# Allegro board ADI_BASEBOARD_V1.brd
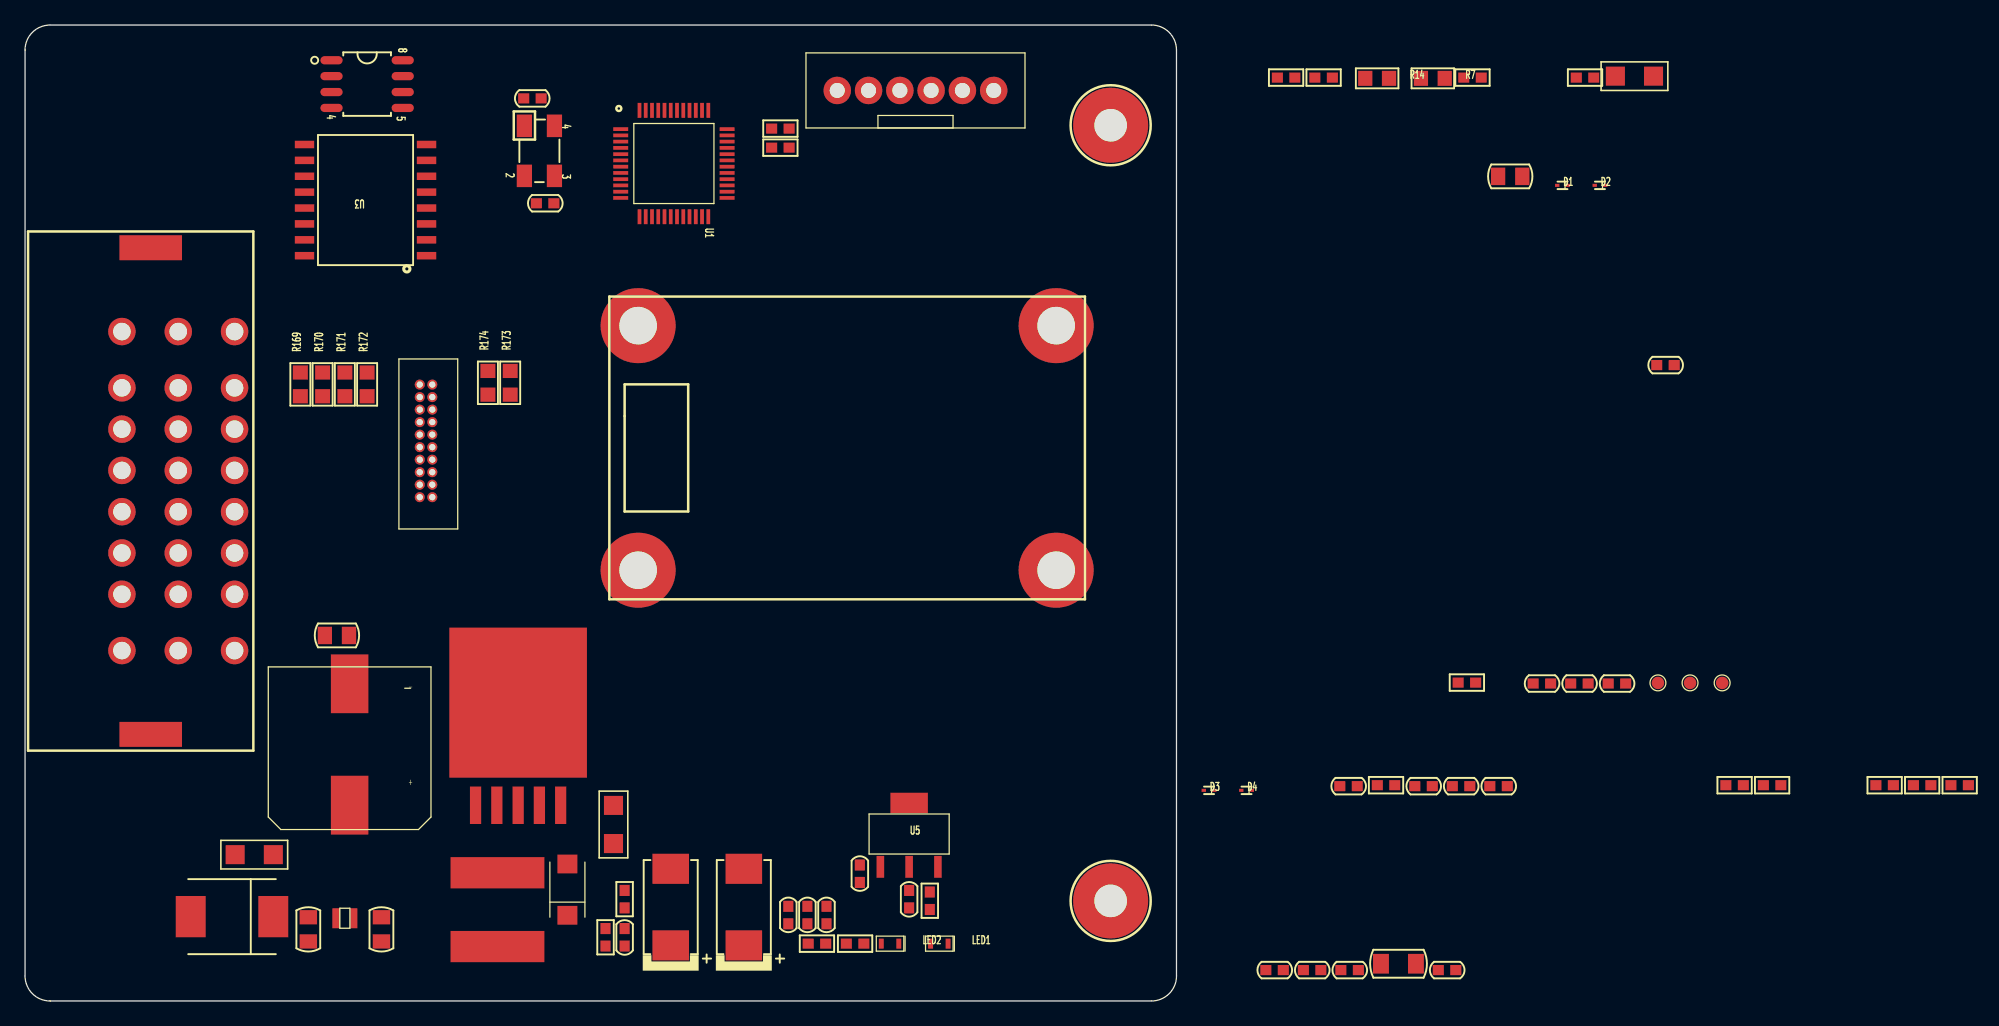
[diagram p0: board, top side]
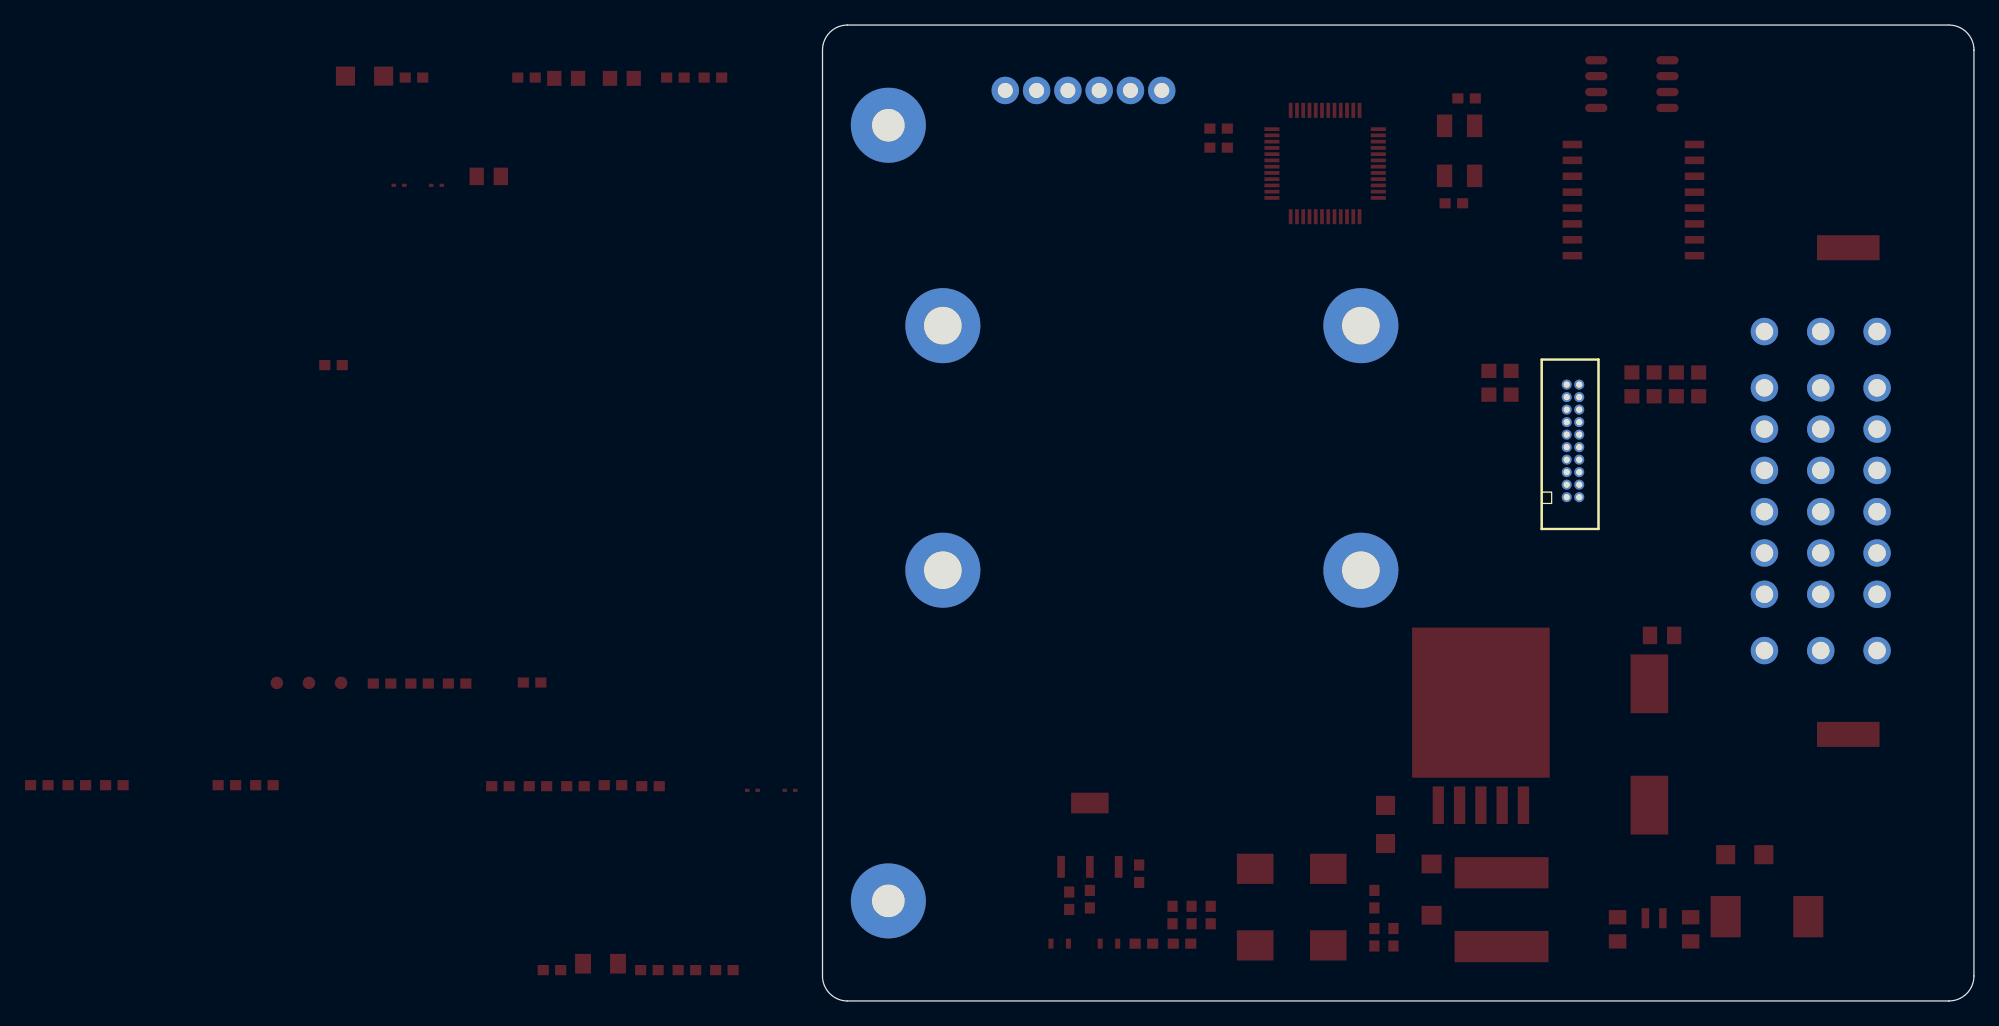
[diagram p1: board, bottom side, seen from below]

Outline 92 x 78.01 mm; copper layers: TOP, BOTTOM. Coordinates in mm from the lower left corner of the outline.
Outline path: 90,78.01 2,78.01 arc(0.59,77.42) 0,76.01 0,76.01 0,2 arc(0.59,0.59) 2,0 90,0 arc(91.42,0.59) 92,2 ; 90,78.01 arc(91.42,77.43) 92,76.01 92,2

## Placement (name value [footprint] x y rotation side)
C1  12pF  [C0603]  40.54 72.15 180 top
C2  0.1uF  [C0603]  105.75 17.17 0 top
C3  12pF  [C0603]  41.56 63.77 0 top
C4  10uF  [C0805]  118.67 65.91 0 top
C5  0.1uF  [C0603]  99.84 2.47 0 top
C6  0.1uF  [C0603]  102.84 2.47 0 top
C7  0.1uF  [C0603]  131.07 50.83 0 top
C8  0.1uF  [C0603]  105.83 2.47 0 top
C9  0.1uF  [C0603]  113.62 2.47 0 top
C10  0.1uF  [C0603]  127.19 25.38 0 top
C11  0.1uF  [C0603]  124.2 25.38 0 top
C12  0.1uF  [C0603]  121.2 25.38 0 top
C13  0.1uF  [C0603]  117.74 17.17 0 top
C14  0.1uF  [C0603]  114.74 17.17 0 top
C15  0.1uF  [C0603]  111.74 17.17 0 top
C16  47uF  [C12_5X13_5]  25.94 20.2 180 top
C17  0.1uF  [C0805]  24.92 29.22 0 top
C18  33nF  [C0603]  47.91 5.09 270 top
C19  1uF  [C0603]  66.7 10.17 90 top
C20  1uF  [C0603]  70.64 8.14 270 top
C21  1uF  [C0603]  60.99 6.87 90 top
C22  68uF  [C7343H19]  51.59 7.5 90 top
C23  68uF  [C7343H19]  57.43 7.5 90 top
C24  1uF  [C0603]  62.51 6.87 90 top
C25  1uF  [C0603]  64.04 6.87 90 top
C123  1000pF  [C1206]  109.74 2.98 0 top
C124  0.1uF  [C0805]  22.63 5.73 270 top
C125  0.1uF  [C0805]  28.48 5.73 270 top
D1  LESD9D3.3CT5G  [SOD-923]  122.85 65.2 0 top
D2  LESD9D3.3CT5G  [SOD-923]  125.84 65.2 0 top
D3  LESD9D3.3CT5G  [SOD-923]  94.6 16.84 0 top
D4  LESD9D3.3CT5G  [SOD-923]  97.6 16.84 0 top
D5  S310  [SMAF]  43.34 8.9 270 top
D31  SMCJ70CA  [SMC]  16.54 6.74 0 top
F1  0437002.WR  [R1206]  18.32 11.7 180 top
H1  Mechanical Hole  [H_M2_6]  86.74 70 0 top
H2  Mechanical Hole  [H_M2_6]  86.74 8 0 top
J1  CON6  [B6B-XH-A]  71.15 72.78 180 top
J2  CON20A  [CON2X10_1MM_I]  32.54 40.27 270 bottom
J3  J_SMALL  [J_CAR_STANDER_SMALL]  16.74 53.51 180 top
J4  CON4  [ADIS16448_BASE]  65.69 44.21 270 top
L1  LVS808040-101M-N  [L808040]  37.75 7.25 270 top
L4  DFP201610TF-4R7M  [DFP201610]  25.56 6.62 0 top
LED1  LED/GREEN  [LED0603]  73.05 4.58 0 top
LED2  LED/GREEN  [LED0603]  69.12 4.58 0 top
NOREF  -  []  68.34 10.72 90 top
NOREF#2  -  []  64.9 72.78 0 top
NOREF#3  -  []  68.34 10.72 0 top
NOREF#4  -  []  22.33 59.57 90 top
NOREF#5  -  []  22.33 59.57 0 top
R1  4.7K  [R0603]  108.75 17.25 0 top
R2  4.7K  [R0603]  60.35 68.21 0 top
R3  4.7K  [R0603]  60.35 69.73 0 top
R4  4.7K  [R0603]  148.59 17.25 0 top
R5  0R  [R0603]  124.65 73.81 0 top
R6  2.2K  [R0603]  136.6 17.25 0 top
R7  22R  [R0805]  112.48 73.75 0 top
R8  100R  [R0603]  103.76 73.81 0 top
R9  120R  [R0603]  115.21 25.45 0 top
R10  100R  [R0603]  151.58 17.25 0 top
R11  100R  [R0603]  154.58 17.25 0 top
R12  100R  [R0603]  100.76 73.81 0 top
R13  4.7K  [R0603]  139.59 17.25 0 top
R14  22R  [R0805]  108.03 73.75 0 top
R15  2.2K  [R0603]  115.65 73.81 0 top
R16  0R  [R0603]  63.27 4.58 0 top
R17  470R  [R0603]  72.29 8.01 270 top
R18  10K  [R0603]  46.38 5.09 90 top
R19  750R  [R0603]  66.32 4.58 0 top
R20  3.3K  [R0603]  47.91 8.14 90 top
R21  0.091R  [R1206]  47.02 14.11 270 top
R168  1M  [R1206]  128.6 73.93 0 top
R169  22R  [R0805]  22 49.29 90 top
R170  22R  [R0805]  23.78 49.29 90 top
R171  22R  [R0805]  25.56 49.29 90 top
R172  22R  [R0805]  27.33 49.29 90 top
R173  22R  [R0805]  38.76 49.41 90 top
R174  22R  [R0805]  36.99 49.41 90 top
TP1  TP  [TP100]  130.47 25.43 0 top
TP2  TP  [TP100]  135.6 25.43 0 top
TP3  TP  [TP100]  133.04 25.43 0 top
U1  STM32F030C8T6  [LQFP48]  51.84 66.94 270 top
U2  BL1585B  [SOP-8]  27.33 73.29 270 top
U3  SP3232EET-L  [SOIC-16]  27.21 64.02 180 top
U4  XL7035  [TO263-5L]  39.4 21.35 270 top
U5  AZ1117EH-3.3  [SOT-223]  70.64 13.35 0 top
X1  8MHz  [SY-AGX-5032]  41.05 67.96 270 top

## Library data of the parts
C1-C15 = CAP NP
C16 C22 C23 = CAP
C17-C21 C24 C25 C123-C125 = C
D1-D4 = DIODE  TRIG
D5 = DIODE SCHOTTKY_0
D31 = DIODE BI-DIR TRIG
F1 = FUSE
H1 H2 = MH8_0
J1 = CON6
J2 = CON20A
J3 = J_SMALL
J4 = CON4
L1 L4 = INDUCTOR IRON_0
LED1 LED2 = LED_3
R1-R21 R168-R174 = R
TP1-TP3 = TP
U1 = STM32F030C8T6
U2 = BL1585B
U3 = SP3232EET-L
U4 = XL7035
U5 = AZ1117EH-3.3
X1 = XTAL4P_13

## Footprints (pads in the part's own frame, mm; a bottom-side part is the same pattern mirrored in y, then rotated)
ADIS16448_BASE
  round 6 hole 3: 1(-9.775,-16.7) 2(9.775,-16.7) 3(9.775,16.7) 4(-9.775,16.7)
B6B-XH-A
  round 2.2 hole 1.2: 1(-6.25,0) 2(-3.75,0) 3(-1.25,0) 4(1.25,0) 5(3.75,0) 6(6.25,0)
C12_5X13_5
  rect 3x4.7 smd: 1(0,4.55) 2(0,-5.15)
C0603
  rect 0.889x0.813 smd: 1(-0.699,0) 2(0.699,0)
C0805
  rect 1.143x1.397 smd: 1(-0.965,0) 2(0.965,0)
C1206
  rect 1.27x1.575 smd: 1(-1.397,0) 2(1.397,0)
C7343H19
  rect 2.413x2.921 smd: 1(-3.061,0) 2(3.061,0)
CON2X10_1MM_I
  round 0.8 hole 0.5: 1(0,0) 2(0,1) 3(-1,0) 4(-1,1) 5(-2,0) 6(-2,1) 7(-3,0) 8(-3,1) 9(-4,0) 10(-4,1) 11(-5,0) 12(-5,1) 13(-6,0) 14(-6,1) 15(-7,0) 16(-7,1) 17(-8,0) 18(-8,1) 19(-9,0) 20(-9,1)
DFP201610
  rect 0.6x1.6 smd: 1(-0.7,0) 2(0.7,0)
H_M2_6
  round 6 hole 2.6: 1(0,0)
J_CAR_STANDER_SMALL
  round 2.2 hole 1.4: 1(0,0) 2(4.5,0) 3(9,0) 4(0,4.5) 5(4.5,4.5) 6(9,4.5) 7(0,7.8) 8(4.5,7.8) 9(9,7.8) 10(0,11.1) 11(4.5,11.1) 12(9,11.1) 13(0,14.4) 14(4.5,14.4) 15(9,14.4) 16(0,17.7) 17(4.5,17.7) 18(9,17.7) 19(0,21) 20(4.5,21) 21(9,21) 22(0,25.5) 23(4.5,25.5) 24(9,25.5)
  rect 5x2 smd: 25(6.7,-6.7) 26(6.7,32.2)
L808040
  rect 2.5x7.5 smd: 1(-3,0) 2(2.9,0)
LED0603
  rect 0.4x0.8 smd: 1(-0.7,0) 2(0.7,0)
LQFP48
  rect 0.3x1.2 smd: 1(-2.75,-4.25) 2(-2.25,-4.25) 3(-1.75,-4.25) 4(-1.25,-4.25) 5(-0.75,-4.25) 6(-0.25,-4.25) 7(0.25,-4.25) 8(0.75,-4.25) 9(1.25,-4.25) 10(1.75,-4.25) 11(2.25,-4.25) 12(2.75,-4.25) 25(2.75,4.25) 26(2.25,4.25) 27(1.75,4.25) 28(1.25,4.25) 29(0.75,4.25) 30(0.25,4.25) 31(-0.25,4.25) 32(-0.75,4.25) 33(-1.25,4.25) 34(-1.75,4.25) 35(-2.25,4.25) 36(-2.75,4.25)
  rect 1.2x0.3 smd: 13(4.25,-2.75) 14(4.25,-2.25) 15(4.25,-1.75) 16(4.25,-1.25) 17(4.25,-0.75) 18(4.25,-0.25) 19(4.25,0.25) 20(4.25,0.75) 21(4.25,1.25) 22(4.25,1.75) 23(4.25,2.25) 24(4.25,2.75) 37(-4.25,2.75) 38(-4.25,2.25) 39(-4.25,1.75) 40(-4.25,1.25) 41(-4.25,0.75) 42(-4.25,0.25) 43(-4.25,-0.25) 44(-4.25,-0.75) 45(-4.25,-1.25) 46(-4.25,-1.75) 47(-4.25,-2.25) 48(-4.25,-2.75)
R0603
  rect 0.889x0.813 smd: 1(-0.699,0) 2(0.699,0)
R0805
  rect 1.14x1.2 smd: 1(-0.95,0) 2(0.95,0)
R1206
  rect 1.524x1.524 smd: 1(1.524,0) 2(-1.524,0)
SMAF
  rect 1.5x1.6 smd: 1(-2.05,0) 2(2.05,0)
SMC
  rect 2.4x3.3 smd: 1(-3.3,0) 2(3.3,0)
SOD-923
  rect 0.35x0.25 smd: 1(-0.42,0) 2(0.42,0)
SOIC-16
  rect 1.55x0.6 smd: 1(-4.875,4.445) 2(-4.875,3.175) 3(-4.875,1.905) 4(-4.875,0.635) 5(-4.875,-0.635) 6(-4.875,-1.905) 7(-4.875,-3.175) 8(-4.875,-4.445) 9(4.875,-4.445) 10(4.875,-3.175) 11(4.875,-1.905) 12(4.875,-0.635) 13(4.875,0.635) 14(4.875,1.905) 15(4.875,3.175) 16(4.875,4.445)
SOP-8
  oval 0.66x1.778 smd: 1(-1.905,-2.845) 2(-0.635,-2.845) 3(0.635,-2.845) 4(1.905,-2.845) 5(1.905,2.845) 6(0.635,2.845) 7(-0.635,2.845) 8(-1.905,2.845)
SOT-223
  rect 0.61x1.75 smd: 1(-2.3,-2.625) 2(0,-2.625) 3(2.3,-2.625)
  rect 3x1.65 smd: 4(0,2.475)
SY-AGX-5032
  rect 1.803x1.219 smd: 1(-2,-1.15) 2(2,-1.15) 3(2,1.25) 4(-2,1.25)
TO263-5L
  rect 3x0.9 smd: 1(5.7,-3.4) 2(5.7,-1.7) 3(5.7,0) 4(5.7,1.7) 5(5.7,3.4)
  rect 12x11 smd: 6(-2.5,0)
TP100
  round 1 smd: 1(0,0)

## Nets
3.3VCC: C9.1 R5.2 U1.9(VDDA)
3.3VDD: C4.1 C5.2 C6.2 C7.2 C8.2 C20.1 J1.1 R1.2 R3.2 R5.1 R17.1 U1.1(VDD1) U1.24(VDD2) U1.48(VDD3) U5.2(OUTPUT)
5VDD: C10.1 C11.2 C19.1 C25.1 R13.1 R15.2 R16.2 R19.1 TP3.1 U2.8(VCC) U3.16(VCC) U5.3(INPUT)
GND: C1.1 C2.1 C3.1 C4.2 C5.1 C6.1 C7.1 C8.1 C9.2 C10.2 C11.1 C13.1 C15.1 C19.2 C20.2 C24.2 C25.2 C123.2 D1.1 D2.1 D3.1 D4.1 J1.6 J2.13 J2.14 J2.15 J4.1 J4.2 J4.3 J4.4 LED1.2(CATHODE) LED2.2(CATHODE) R2.2 R4.1 R6.1 R20.2 R21.2 R168.2 U1.8(VSSA) U1.23(VSS1) U1.47(VSS2) U2.5(GND) U3.15(GND) U4.5(OGND) U5.1(ADJ) U5.4(PAD) X1.2 X1.4
VCC: C16.1 C17.1 C125.1 L4.2 U4.1(VIN)
VDD: J2.10 J2.11 J2.12
VIN: F1.1 J3.22 J3.23 J3.24
BGND: C16.2 C17.2 C21.2 C22.2 C23.2 C124.2 C125.2 D5.1 D31.1 J3.1 J3.2 J3.3 J3.25 J3.26 R21.1 U4.3(GND#3) U4.6(GND#6)
BOOT0: R4.2 TP1.1 U1.44(BOOT0)
CSN: J2.6 R171.1
DIN: J2.5 R173.1
DIO1: J2.7 R174.1
DIO2: J2.9
DIO3: J2.1
DIO4/CLK: J2.2 R169.1
DNC: J2.16 J2.17 J2.18 J2.19 J2.20
DOUT: J2.4 R170.1
EARTH: C123.1 H1.1 H2.1 R168.1
NRST: C2.2 R1.1 TP2.1 U1.7(NRST)
OSC_IN: C1.2 U1.5(PF0-OSC_IN) X1.1
OSC_OUT: C3.2 U1.6(PF1-OSC_OUT) X1.3
PA0: U1.10(PA0)
PA1: U1.11(PA1)
PA4: R171.2 U1.14(PA4)
PA8: R13.2 U1.29(PA8) U2.2(R\E\) U2.3(DE)
PA11: U1.32(PA11)
PA12: U1.33(PA12)
PA15: U1.38(PA15)
PB0: R174.2 U1.18(PB0)
PB1: R172.2 U1.19(PB1)
PB2: U1.20(PB2)
PB3: U1.39(PB3)
PB4: U1.40(PB4)
PB5: U1.41(PB5)
PB6: U1.42(PB6/USART1_TX)
PB7: U1.43(PB7/USART1_RX)
PB8: U1.45(PB8)
PB9: U1.46(PB9)
PB10: U1.21(PB10)
PB11: U1.22(PB11)
PB12: U1.25(PB12)
PB13: U1.26(PB13)
PB14: U1.27(PB14)
PB15: U1.28(PB15)
PC13: U1.2(PC13)
PC14: U1.3(PC14-OSC32_IN)
PC15: U1.4(PC14-OSC32_OUT)
PF6: R2.1 U1.35(PF6)
PF7: R3.1 U1.36(PF7)
RS232_RIN: J3.8 U3.13(R1IN)
RS232_TOUT: J3.7 U3.14(T1OUT)
RS485_A: J3.5 R14.2
RS485_B: J3.4 R7.2
RSTN: J2.8 R172.1
SCLK: J2.3
SPI1_MISO: R170.2 U1.16(PA6)
SPI1_MOSI: R173.2 U1.17(PA7)
SPI1_SCK: R169.2 U1.15(PA5)
SWCLK: D4.2 J1.5 U1.37(PA14/SCK)
SWDIO: D3.2 J1.4 U1.34(PA13/SWDIO)
UART1_RX: D1.2 J1.2 R8.1 R10.2 U1.31(PA10)
UART1_TX: D2.2 J1.3 R11.1 R12.2 U1.30(PA9)
UART2_RX: U1.13(PA3)
UART2_TX: U1.12(PA2)
N75707: R8.2 U2.1(RO)
N75811: R6.2 R7.1 R9.2 U2.7(B)
N75823: R9.1 R14.1 R15.1 U2.6(A)
N78927: C12.2 U3.3(C1-)
N78931: C14.2 U3.5(C2-)
N78935: C14.1 U3.4(C2+)
N78950: C12.1 U3.1(C1+)
N79188: C13.2 U3.2(V+)
N79459: C15.2 U3.6(V-)
N79870: R10.1 U3.12(R1OUT)
N79874: R12.1 U3.11(T1IN)
N81577: R11.2 U2.4(DI)
N83239: J3.21
N83243: J3.20
N83247: J3.19
N83275: J3.18
N83279: J3.17
N83283: J3.16
N83311: J3.15
N83315: J3.14
N83319: J3.13
N83347: J3.12
N83351: J3.11
N83355: J3.10
N83391: J3.6
N83419: J3.9
N87317: C18.2 C21.1 C22.1 C23.1 C24.1 L1.2 R16.1 R18.1
N87639: D5.2 L1.1 U4.2(SW)
N87659: C18.1 R18.2 R20.1 U4.4(FB)
N113219: LED2.1(ANODE) R19.2
N113735: LED1.1(ANODE) R17.2
N131147: C124.1 D31.2 F1.2 L4.1

Pads without a net: U3 7 8 9 10
